# EAGLE board GB202-CC-from-SF-Base (EAGLE 7.5.0)
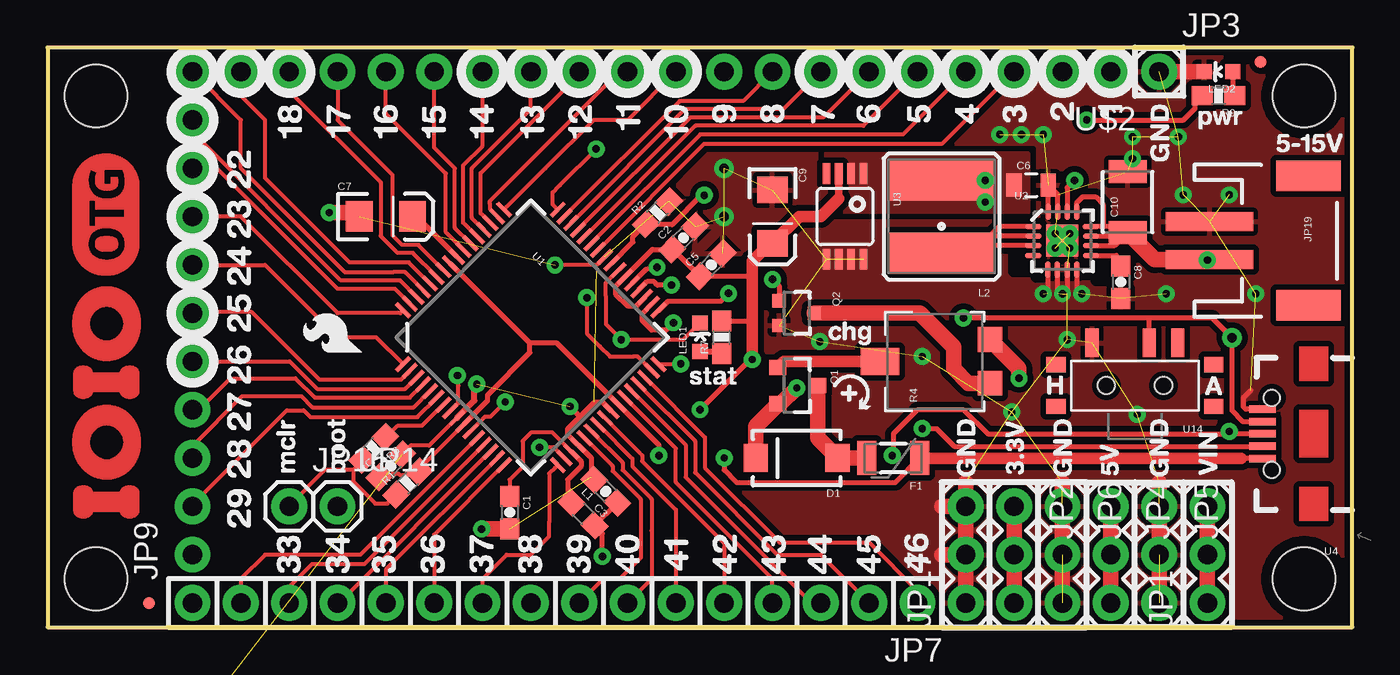
[diagram p0: board, top side]
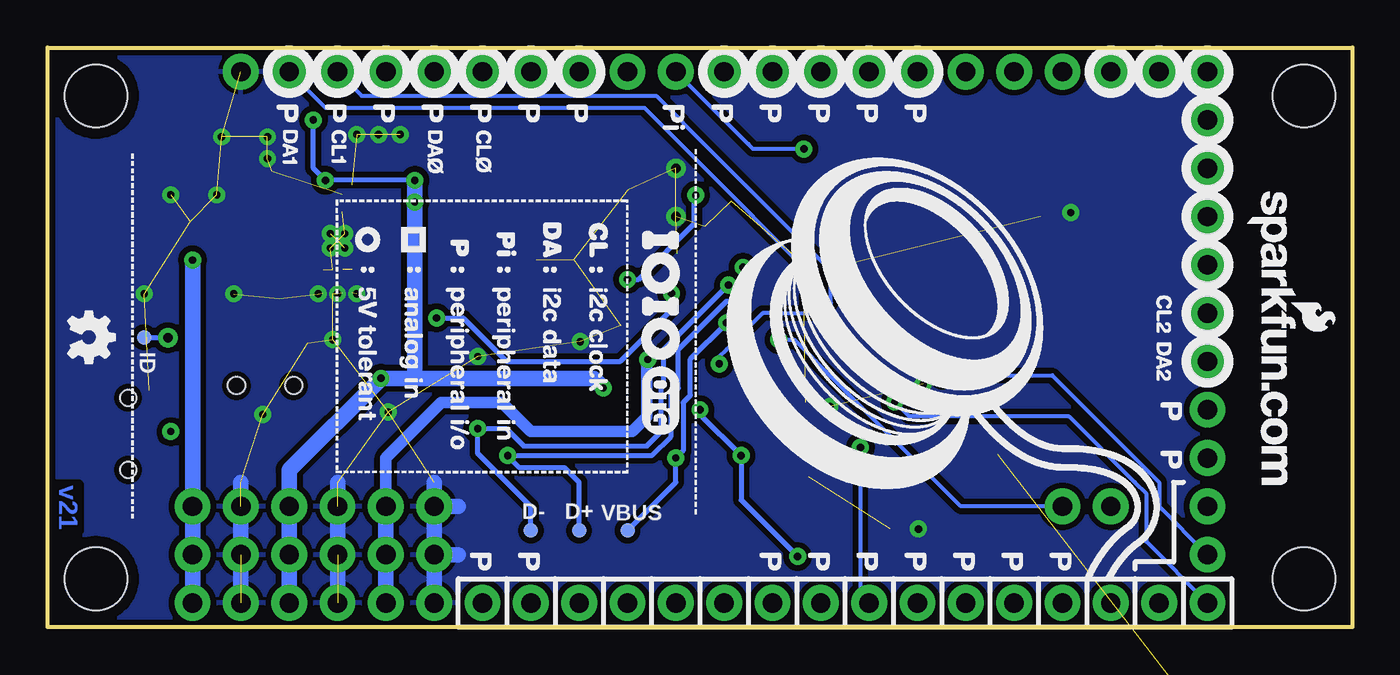
[diagram p1: board, bottom side, seen from below]

Size 68.58 x 30.48 mm. Coordinates in mm from the lower left corner, seen from the top.
Outline: 0,0 68.58,0 68.58,30.48 0,30.48 0,0
Copper layers (1*16): Top 0.035mm / dielectric 1.5mm / Bottom 0.035mm
Design rules "SparkFun *": minimum track width 7mil, minimum drill 15mil, track to track 8mil, track to pad 8mil, pad to pad 8mil, via to via 8mil, smd to smd 8mil, copper to edge 8mil, drill to drill 8mil, minimum pad ring 12mil, minimum via ring 10mil, stop-mask expansion 4mil, vias tented up to drill 20mil, thermal gap 10mil
tRestrict: area 52.7,18.6 to 52.9,19.1; area 52,18.4 to 52.4,19.1; area 53.7,18.5 to 54,19.1; area 54.2,18.5 to 55,19.1; area 52.7,21.6 to 52.9,22.1; area 53.1,19.4 to 53.6,19.5; area 53,21.2 to 53.5,21.3; area 50.8,18.7 to 51.2,19.6; area 51.2,18.7 to 51.7,19.2; area 55.1,18.2 to 55.8,19

## Footprints (pad centres in the part's own frame; a part is rotated, then mirrored left to right if it is on the bottom)
0603-CAP = smd 1.1 x 1: 1 -0.85,0; 2 0.85,0
0805 = smd 0.8 x 1.2: 1 -0.9,0; 2 0.9,0
EIA3216 = smd 1.4 x 1.6: A 1.4,0; C -1.4,0
1210 = smd 1.2 x 2: 1 -1.6,0; 2 1.6,0
C0603 = smd 1.1 x 1: 1 -0.85,0; 2 0.85,0
CAP-PTH-SMALL = drill 0.7 pad 1.651: 1 0,0; 2 2.54,0
SMA-DIODE = smd 1.27 x 1.47: A -2.15,0; C 2.15,0
PTC-1206 = smd 1 x 1.8: 1 -1.4,0; 2 1.4,0
DIL16 = drill 0.813 pad 1.6: 1 -8.89,-3.81 | drill 0.813 pad 1.6 octagon: 2 -6.35,-3.81; 3 -3.81,-3.81; 4 -1.27,-3.81; 5 1.27,-3.81; 6 3.81,-3.81; 7 6.35,-3.81; 8 8.89,-3.81; 9 8.89,3.81; 10 6.35,3.81; 11 3.81,3.81; 12 1.27,3.81; 13 -1.27,3.81; 14 -3.81,3.81; 15 -6.35,3.81; 16 -8.89,3.81
1X03 = drill 1.016 pad 1.88: 1 0,0; 2 2.54,0; 3 5.08,0
1X01 = drill 1.016 pad 1.88: 1 0,0
1X16_NO_SILK = drill 1.016 pad 1.88: 1 0,0; 2 2.54,0; 3 5.08,0; 4 7.62,0; 5 10.16,0; 6 12.7,0; 7 15.24,0; 8 17.78,0; 9 20.32,0; 10 22.86,0; 11 25.4,0; 12 27.94,0; 13 30.48,0; 14 33.02,0; 15 35.56,0; 16 38.1,0
MICRO-FIDUCIAL = smd 0.635 x 0.635: 1 0,0
1X11_NO_SILK = drill 1.016 pad 1.88: 1 0,0; 2 2.54,0; 3 5.08,0; 4 7.62,0; 5 10.16,0; 6 12.7,0; 7 15.24,0; 8 17.78,0; 9 20.32,0; 10 22.86,0; 11 25.4,0
STAND-OFF = hole 3.302: 0,0
JST-2-SMD = smd 1 x 4.6: 1 -1,-3.7; 2 1,-3.7 | smd 1.6 x 3.4: NC1 -3.4,1.5; NC2 3.4,1.5
0603 = smd 1.1 x 1: 1 -0.85,0; 2 0.85,0
CR54 = smd 5.5 x 2.15: P$1 0,1.92; P$2 0,-1.92
LED-0603 = smd 0.8 x 0.8: A 0,-0.75; C 0,0.75
SOT23-3 = smd 0.8 x 0.9: 1 -0.95,-1; 2 0.95,-1; 3 0,1.1
SOT323_NOAT = smd 0.7 x 0.7: 1 -0.65,-0.925; 2 0.65,-0.925; 3 0,0.925
HC49/S = drill 0.813: 1 -2.413,0; 2 2.413,0
0603-RES = smd 1.1 x 1: 1 -0.85,0; 2 0.85,0
TRIMPOT_5MM = smd 1.3 x 1.3: A 1.15,-2.54; C -1.15,-2.54 | smd 1.402 x 2: B 0,3.239
PAD.03X.03 = smd 0.762 x 0.762: P$1 0,0
PIC24FXXX_TQFP64 = smd 0.22 x 1: 1 -3.75,-5.75; 2 -3.25,-5.75; 3 -2.75,-5.75; 4 -2.25,-5.75; 5 -1.75,-5.75; 6 -1.25,-5.75; 7 -0.75,-5.75; 8 -0.25,-5.75; 9 0.25,-5.75; 10 0.75,-5.75; 11 1.25,-5.75; 12 1.75,-5.75; 13 2.25,-5.75; 14 2.75,-5.75; 15 3.25,-5.75; 16 3.75,-5.75; 33 3.75,5.75; 34 3.25,5.75; 35 2.75,5.75; 36 2.25,5.75; 37 1.75,5.75; 38 1.25,5.75; 39 0.75,5.75; 40 0.25,5.75; 41 -0.25,5.75; 42 -0.75,5.75; 43 -1.25,5.75; 44 -1.75,5.75; 45 -2.25,5.75; 46 -2.75,5.75; 47 -3.25,5.75; 48 -3.75,5.75 | smd 1 x 0.22: 17 5.75,-3.75; 18 5.75,-3.25; 19 5.75,-2.75; 20 5.75,-2.25; 21 5.75,-1.75; 22 5.75,-1.25; 23 5.75,-0.75; 24 5.75,-0.25; 25 5.75,0.25; 26 5.75,0.75; 27 5.75,1.25; 28 5.75,1.75; 29 5.75,2.25; 30 5.75,2.75; 31 5.75,3.25; 32 5.75,3.75; 49 -5.75,3.75; 50 -5.75,3.25; 51 -5.75,2.75; 52 -5.75,2.25; 53 -5.75,1.75; 54 -5.75,1.25; 55 -5.75,0.75; 56 -5.75,0.25; 57 -5.75,-0.25; 58 -5.75,-0.75; 59 -5.75,-1.25; 60 -5.75,-1.75; 61 -5.75,-2.25; 62 -5.75,-2.75; 63 -5.75,-3.25; 64 -5.75,-3.75
QFN16-3X3MM_1:1_V03 = smd 0.85 x 0.28: 1 -1.524,0.75; 2 -1.524,0.253; 3 -1.529,-0.25; 4 -1.527,-0.774; 9 1.503,-0.77; 10 1.498,-0.245; 11 1.498,0.255; 12 1.495,0.755 | smd 0.28 x 0.85: 5 -0.765,-1.513; 6 -0.265,-1.513; 7 0.263,-1.513; 8 0.763,-1.513; 13 0.758,1.518; 14 0.258,1.518; 15 -0.247,1.518; 16 -0.742,1.518 | smd 1.68 x 1.68: EXT -0.009,0.008
MSOP8 = smd 0.4 x 1.1: 1 -0.975,-2.25; 2 -0.325,-2.25; 3 0.325,-2.25; 4 0.975,-2.25; 5 0.975,2.25; 6 0.325,2.25; 7 -0.325,2.25; 8 -0.975,2.25
USB-AB-MICRO-SMD_V03 = smd 1.4 x 0.4: D+1 2.7,0; D-1 2.7,0.65; GND1 2.7,-1.3; ID1 2.7,-0.65; VBUS1 2.7,1.3 | hole 0.85: 2.2,1.9; 2.2,-1.9
TSSOP16 = smd 0.4 x 1.6: 1 -2.225,-2.85; 2 -1.575,-2.85; 3 -0.925,-2.85; 4 -0.275,-2.85; 5 0.375,-2.85; 6 1.025,-2.85; 7 1.675,-2.85; 8 2.325,-2.85; 9 2.325,3.05; 10 1.675,3.05; 11 1.025,3.05; 12 0.375,3.05; 13 -0.275,3.05; 14 -0.925,3.05; 15 -1.575,3.05; 16 -2.225,3.05
KPS-1290 = smd 0.7 x 1.5: O -2.25,2.25; P 0.75,2.25; S 2.25,2.25 | smd 1 x 0.8: P$1 -4.15,1.1; P$2 -4.15,-1.1; P$3 4.15,-1.1; P$4 4.15,1.1 | hole 0.9: -1.5,0; 1.5,0
1X19_NO_SILK = drill 1.016 pad 1.88: 1 0,0; 2 2.54,0; 3 5.08,0; 4 7.62,0; 5 10.16,0; 6 12.7,0; 7 15.24,0; 8 17.78,0; 9 20.32,0; 10 22.86,0; 11 25.4,0; 12 27.94,0; 13 30.48,0; 14 33.02,0; 15 35.56,0; 16 38.1,0; 17 40.64,0; 18 43.18,0; 19 45.72,0
RTRIM3362P = drill 0.6: 1 -2.54,-2.54; 2 0,0; 3 2.54,-2.54

## Placement (x,y rotation side)
C1  0.1uF  [0603-CAP]  24.28,6.02 270 top
C2  0.1uF  [0603-CAP]  33.43,20.47 45 top
C3  0.1uF  [0603-CAP]  29.34,7.14 135 top
C4  0.1uF  [0603-CAP]  18.03,8.48 45 top
C5  0.1uF  [0603-CAP]  34.87,19.05 45 top
C6  10uf  [0805]  51.69,23.24 0 top
C7  10uF  [EIA3216]  17.78,21.59 0 top
C8  3.3nF  [0603-CAP]  56.41,18.14 270 top
C9  10uf  [EIA3216]  38.1,21.59 270 top
C10  10uf  [1210]  56.77,22.35 90 top
C11  [C0603]  7.62,-74.93 0 top  (outside the outline)
C12  [C0603]  12.7,-74.93 0 top  (outside the outline)
C13  .1uF  [C0603]  13.97,-64.77 0 top  (outside the outline)
C14  .1uF  [C0603]  20.32,-64.77 0 top  (outside the outline)
C15  .1  [CAP-PTH-SMALL]  1.27,-21.59 0 top  (outside the outline)
C16  .1  [CAP-PTH-SMALL]  6.35,-21.59 0 top  (outside the outline)
C17  .1  [CAP-PTH-SMALL]  1.27,-26.67 0 top  (outside the outline)
C18  .1uF  [C0603]  1.27,-74.93 0 top  (outside the outline)
D1  DIODE-SCHOTTKY_  [SMA-DIODE]  39.37,8.89 180 top
F1  PTCSMD  [PTC-1206]  44.45,8.89 180 top
IC1  [DIL16]  10.16,-57.15 0 top  (outside the outline)
JP1  VIN  [1X03]  60.96,1.27 90 top
JP2  [1X03]  50.8,6.35 270 top
JP3  M01PTH  [1X01]  58.42,29.21 0 top
JP4  5V  [1X03]  55.88,6.35 270 top
JP5  [1X03]  58.42,6.35 270 top
JP6  [1X03]  53.34,6.35 270 top
JP7  M161X16_NO_SILK  [1X16_NO_SILK]  45.72,1.27 180 top
JP8  FIDUCIALUFIDUCIAL  [MICRO-FIDUCIAL]  5.33,1.27 0 top
JP9  M111X11_NO_SILK  [1X11_NO_SILK]  7.62,3.81 90 top
JP10  STAND-OFF  [STAND-OFF]  66.04,27.94 0 top
JP11  STAND-OFF  [STAND-OFF]  66.04,2.54 0 top
JP12  STAND-OFF  [STAND-OFF]  2.54,27.94 0 top
JP13  STAND-OFF  [STAND-OFF]  2.54,2.54 0 top
JP14  M01PTH  [1X01]  15.24,6.35 0 top
JP15  M01PTH  [1X01]  12.7,6.35 0 top
JP16  FIDUCIALUFIDUCIAL  [MICRO-FIDUCIAL]  63.75,29.72 0 top
JP17  [1X03]  48.26,1.27 90 top
JP19  JST Connector  [JST-2-SMD]  64.77,20.32 270 top
L1  30Ohm,1.8A  [0603]  28.14,5.94 315 top
L2  VLC5045T-3R3N  [CR54]  46.99,21.59 180 top
LED1  LY L29K-J1K2-26-Z  [LED-0603]  34.29,15.24 0 top
LED2  LS L29K-G1J2-1-Z  [LED-0603]  61.54,29.21 90 top
Q1  IRLML2244  [SOT23-3]  39.37,12.7 270 top
Q2  MOSFET-NCHANNEL2N7002PW"  [SOT323_NOAT]  39.37,16.51 270 top
Q3  4.4336Mhz  [HC49/S]  6.35,-67.31 0 top  (outside the outline)
R1  10k  [0603-RES]  18.92,7.57 45 top
R2  100k  [0603-RES]  32.05,21.79 45 top
R4  TRIMPOTSMD_STANDARD  [TRIMPOT_5MM]  46.99,13.97 90 top
R7  750  [0603-RES]  35.43,15.24 90 top
R8  470  [0603-RES]  17.14,9.4 225 top
R9  1.6k  [0603-RES]  61.54,27.94 180 top
TP1  TEST-POINT3  [PAD.03X.03]  38.1,5.08 0 bottom
TP2  TEST-POINT3  [PAD.03X.03]  43.18,5.08 0 bottom
TP3  TEST-POINT3  [PAD.03X.03]  40.64,5.08 0 bottom
TP4  TEST-POINT3  [PAD.03X.03]  63.5,15.24 180 bottom
U1  PIC24FJ256GB206  [PIC24FXXX_TQFP64]  25.4,15.24 315 top
U2  TPS6214X""  [QFN16-3X3MM_1:1_V03]  53.34,20.32 0 top
U3  VREG_MIC5216  [MSOP8]  41.91,21.59 180 top
U4  [USB-AB-MICRO-SMD_V03]  66.55,10.16 180 top
U5  MAX232TSSOP  [TSSOP16]  3.81,-15.24 0 top  (outside the outline)
U14  SWITCH_SPDT  [KPS-1290]  57.15,12.7 0 top
U$1  CREATIVE_COMMONS  [CREATIVE_COMMONS]  21.59,-10.16 0 top  (outside the outline)
U$2  M191X19_NO_SILK  [1X19_NO_SILK]  55.88,29.21 180 top
U$3  RTRIM-3362P  [RTRIM3362P]  3.81,-31.75 0 top  (outside the outline)
U$6  IOIO-OTG  [IOIO-OTG-COPPER-EXPOSED]  4.83,5.71 90 top
U$13  RTRIM-3362P  [RTRIM3362P]  15.24,-31.75 0 top  (outside the outline)
U$14  RTRIM-3362P  [RTRIM3362P]  3.81,-43.18 0 top  (outside the outline)

## Library data of the parts
C1-C5 C8 C9 C15-C17 = SparkFun-Capacitors
C6 C10 L1 TP1-TP4 = SparkFun-Passives
C7 JP1-JP6 JP8 JP10-JP17 JP19 LED2 = SparkFun
C11-C14 C18 = rcl
D1 Q1 Q2 = SparkFun-DiscreteSemi
F1 U2 U3 = SparkFun-PowerIC
IC1 = tcm3105
JP7 JP9 U$2 = SparkFun-Connectors
L2 = SparkFun-Passives; AM: 3.3uH
LED1 = SparkFun-LED
Q3 = crystal; OC_FARNELL: 1667008; OC_NEWARK: unknown
R1 R2 R7-R9 = SparkFun-Resistors
R4 U4 = Testing
U1 U5 = SparkFun-DigitalIC
U14 = SparkFun-Electromechanical
U$1 U$6 = SparkFun-Aesthetics
U$3 U$13 U$14 = GeekAmmo

## Nets
3.3V: C2.1 C3.1 C4.1 C5.1 C9.A JP2.1 JP2.2 JP2.3 L1.2 R1.2 R7.2 U1.10 U1.26 U1.35 U1.38 U1.57 U3.3
5V: C6.1 D1.C JP4.1 JP4.2 JP4.3 L2.P$2 Q1.2 R4.A R9.2 U2.14 U3.1 U3.2
+3.3: U5.16
+5.0: IC1.1 U$3.3 U$13.3
BOOT: JP14.1 LED1.C U1.39
D+: TP3.P$1 U1.37 U4.D+1
D-: TP2.P$1 U1.36 U4.D-1
GND: C1.2 C2.2 C3.2 C4.2 C5.2 C6.2 C7.C C8.2 C9.C C10.2 C11.2 C12.2 IC1.5 IC1.12 IC1.13 JP3.1 JP5.1 JP5.2 JP5.3 JP6.1 JP6.2 JP6.3 JP17.1 JP17.2 JP17.3 JP19.1 LED2.C Q2.2 R2.2 U1.9 U1.20 U1.25 U1.41 U2.5 U2.6 U2.7 U2.8 U2.15 U2.16 U2.EXT U3.5 U3.6 U3.7 U3.8 U4.GND1 U5.15 U14.O U$3.1 U$13.1 U$14.1
HOST: Q2.1 R2.1 U1.40
MCLR: R8.1 U1.7
N$1: Q1.1 R4.B
N$2: LED1.A R7.1
N$3: LED2.A R9.1
N$4: D1.A F1.2 Q1.3
N$5: C7.A U1.56
N$6: L2.P$1 U2.1 U2.2 U2.3
N$7: C8.1 U2.9
N$8: Q2.3 R4.C
N$9: C1.1 L1.1 U1.19
N$10: C11.1 IC1.16 Q3.2
N$11: C12.1 IC1.15 Q3.1
N$12: C13.1 IC1.4
N$13: C14.1 U$14.2
N$17: IC1.10 U$13.2
N$18: IC1.7 U$3.2
N$19: C18.1 IC1.11
N$20: C18.2 U$14.3
N$23: C15.1 U5.1
N$25: C15.2 U5.3
N$26: C16.1 U5.4
N$27: C16.2 U5.5
N$28: C17.2 U5.6
N$29: C17.1 U5.2
P7: JP15.1 R1.1 R8.2
PIN1: U1.31 U$2.1
PIN2: U1.32 U$2.2
PIN3: U1.42 U$2.3
PIN4: U1.43 U$2.4
PIN5: U1.44 U$2.5
PIN6: U1.45 U$2.6
PIN7: U1.46 U$2.7
PIN8: U1.47 U$2.8
PIN9: U1.48 U$2.9
PIN10: U1.49 U$2.10
PIN11: U1.50 U$2.11
PIN12: U1.51 U$2.12
PIN13: U1.52 U$2.13
PIN14: U1.53 U$2.14
PIN15: U1.54 U$2.15
PIN16: U1.55 U$2.16
PIN17: U1.58 U$2.17
PIN18: U1.59 U$2.18
PIN19: U1.60 U$2.19
PIN20: JP9.11 U1.61
PIN21: JP9.10 U1.62
PIN22: JP9.9 U1.63
PIN23: JP9.8 U1.64
PIN24: JP9.7 U1.1
PIN25: JP9.6 U1.2
PIN26: JP9.5 U1.3
PIN27: JP9.4 U1.4
PIN28: JP9.3 U1.5
PIN29: JP9.2 U1.6
PIN30: JP9.1 U1.8
PIN31: JP7.16 U1.11
PIN32: JP7.15 U1.12
PIN33: JP7.14 U1.13
PIN34: JP7.13 U1.14
PIN35: JP7.12 U1.15
PIN36: JP7.11 U1.16
PIN37: JP7.10 U1.17
PIN38: JP7.9 U1.18
PIN39: JP7.8 U1.21
PIN40: JP7.7 U1.22
PIN41: JP7.6 U1.23
PIN42: JP7.5 U1.24
PIN43: JP7.4 U1.27
PIN44: JP7.3 U1.28
PIN45: JP7.2 U1.29
PIN46: JP7.1 U1.30
QTR1-RX: U5.13
QTR1-RXD: U5.12
QTR1-TX: U5.14
QTR1-TXD: U5.11
QTR2-RX: U5.8
QTR2-RXD: U5.9
QTR2-TX: U5.7
QTR2-TXD: U5.10
RX-A: C13.2
TCM-RXD: IC1.8
TCM-TXD: IC1.14
TX-A: C14.2
USBID: TP4.P$1 U1.33 U4.ID1 U14.P
VBUS: F1.1 TP1.P$1 U1.34 U4.VBUS1
VIN: C10.1 JP1.1 JP1.2 JP1.3 JP19.2 U2.10 U2.11 U2.12 U2.13
VSS: IC1.9

## Tracks (layer width: path | path; a pad name or v marks a point on that pad's centre or on a via)
3.3V  (via drill 0.38)
  Top 0.203: U1.38 | 36.97,16.09 37.03,16.03 | C5.1 34.25,18.45 | R1.2 19.43,8.26 19.48,8.26 U1.10 | R1.2 19.36,8.34 19.36,8.08 | 29.16,4.93 L1.2 | C4.1 17.94,7.88 18.14,8.08 18.44,8.08 18.52,8 19.36,8 R1.2
  Top 0.254: U1.38 31.79,19.86 32.81,19.86 C2.1 32.85,19.87 C5.1 36.76,18.45 36.98,18.67 37.03,18.62 | U1.38 29.84,17.92 29.84,17.53 30.48,16.89 30.94,16.89 U1.35 | v32.13,9.02 32.13,9.57 U1.26 26.76,14.94 25.35,14.94 | U1.10 23.11,11.89 23.11,12.19 25.35,14.43 25.35,14.94 | 25.35,14.94 U1.57 | 37.02,15.89 37.03,15.88 | v34.29,11.43 36.93,14.07 v37.03,14.07 | R7.2 36.97,16.09 | L1.2 C3.1 | v29.16,3.71 29.16,4.93
  Top 0.406: U3.3 41.59,22.54
  Top 0.61: v37.03,14.07 37.03,15.88 37.03,16.03 37.03,18.62 37.03,19.25 38.1,20.32 C9.A 39.5,21.59 40.64,21.59 41.59,22.54
  Top 0.813: JP2.1 JP2.2 JP2.3
  Bottom 0.254: v34.29,11.43 34.29,11.18 v32.13,9.02 32.13,6.68 v29.16,3.71
  Bottom 0.61: JP2.1 50.8,8.89 47.88,11.81 44.7,11.81 43.18,10.29 37.85,10.29 37.08,11.05 37.08,14.02 v37.03,14.07
  Bottom 0.813: JP2.3 JP2.1
5V  (via drill 0.38)
  Top 0.254: v53.98,23.5 53.59,23.11 U2.14 | v54.61,26.67 59.69,26.67 60.31,27.29 60.31,27.56 R9.2
  Top 0.813: JP4.1 JP4.2 JP4.3 | Q1.2 38.42,11.75 | 38.42,11.75 37.22,10.55 D1.C | v51.05,13.08 51.05,13.59 R4.A | 38.42,11.75 38.55,11.75 v39.37,12.57
  Bottom 0.254: v54.61,26.67 54.61,24.13 v53.98,23.5 v49.28,23.5
  Bottom 0.813: JP4.3 JP4.1 55.88,8.26 v51.05,13.08 49.53,13.08 | 49.53,13.08 39.88,13.08 v39.37,12.57 | v49.28,23.5 49.28,13.34 49.53,13.08
  other vias: 49.28,22.35
  pour Top (isolate 0.305, rank 2, no thermals): 40.89,21.84 51.56,21.84 51.56,24.89 40.89,24.89
+5.0  (2 unrouted)
BOOT  (via drill 0.38)
  Top 0.203: U1.39 29.34,18.12 29.34,17.4 29.34,17.02 29.34,15.93 v30.15,15.11 33.41,15.11 LED1.C
  Top 0.254: LED1.C 34.28,15.99
  Bottom 0.203: JP14.1 20.32,6.35 20.57,6.35 28.19,13.97 | 28.19,13.97 28.45,14.22 | 28.19,13.97 28.45,14.22 | v30.15,15.11 29.34,15.11 28.45,14.22
D+  (via drill 0.38)
  Top 0.254: v32.03,18.92 31.43,18.8 U1.37 | v44.4,9.02 44.45,9.07 44.45,10.16 45.72,11.43 48.13,11.43 49.4,10.16 61.98,10.16 v62.1,10.29 62.23,10.16 U4.D+1
  Bottom 0.254: v32.03,18.92 32,18.9 32,17.65 32.51,17.14 32.89,17.14 35.43,14.61 35.43,12.57 35.81,12.19 35.81,10.03 36.83,9.02 v44.4,9.02 43.76,8.38 41.4,8.38 40.64,7.62 TP3.P$1 | 62.36,10.03 v62.1,10.29
D-  (via drill 0.38)
  Top 0.254: v32.79,17.98 32.05,17.98 31.88,18.16 31.5,18.16 U1.36 | v45.97,10.44 46.71,10.44 47.64,9.51 U4.D-1
  Bottom 0.254: v32.79,17.98 32.82,17.98 36.2,14.61 36.2,12.7 36.32,12.57 36.32,10.29 37.08,9.53 43.56,9.53 44.48,10.44 v45.97,10.44 45.97,9.14 43.18,6.35 TP2.P$1
GND  (via drill 0.38, 0.38 pad 0.03, 0.38 pad 0.89, 0.51)  (65 unrouted)
  Top 0.203: U1.41 28.86,19.05 v26.67,19.05 | U1.9 20.05,9.54 19.09,9.54 C4.2
  Top 0.254: U1.25 29.18,11.81 28.73,11.81 28,11.09 | C7.C 16.18,21.79 | 28,11.09 27.33,10.41 27.33,10.13 U1.20 27.88,9.58 28.57,8.89 28.57,7.9 C3.2 | v27.46,11.61 27.98,11.09 28,11.09 | U2.5 52.58,17.59 52.56,17.57 | U2.6 53.08,17.59 53.09,17.57 | U2.7 53.6,17.54 53.59,17.53 | U2.8 54.1,17.57 | U2.16 52.6,22.86 | 52.6,22.86 C6.2 | U2.15 53.09,22.74 C6.2 52.59,22.87 52.6,22.86 | U4.GND1 62.96,11.46 62.87,11.56 62.87,12.06 63.25,12.45
  Top 0.305: U1.9 22.43,11.91 22.43,12.65 v22.55,12.78
  Top 0.813: 16.18,21.79 v14.81,21.79 | JP6.3 53.34,7.62 | JP17.1 JP17.2 | JP17.2 JP17.3 | JP17.3 48.26,7.62 | JP17.3 46.99,6.35 | JP17.2 46.99,3.81 | 58.42,7.62 JP5.3 | LED2.C JP3.1 | v22.81,5.16 24.27,5.16 C1.2
  Bottom 0.813: 48.26,7.62 JP17.3 | JP17.3 JP17.2 | JP17.2 JP17.1 | JP17.3 46.99,6.35 | JP17.2 46.99,3.81 | 53.34,7.62 JP6.3 | 58.42,7.62 JP5.3
  other vias: 59.69,22.73 62.1,22.73 58.8,17.53 63.5,17.53 57.28,11.18 45.97,14.22 40.59,15.01 52.96,20.7 53.72,20.7 52.96,19.94 53.72,19.94 50.67,11.3 53.59,15.11 59.44,25.78 57.02,25.78 57.02,24.64 52.32,25.91 51.18,25.91 50.04,25.91 35.56,24.13 35.56,21.59 52.32,17.53 53.34,17.53 54.36,17.53
  pour Bottom (isolate 0.305): 6.35,30.48 68.58,30.48 68.58,0 6.35,0
  pour Top (isolate 0.305, rank 6): 32.03,30.35 32.03,-0.13 68.58,0 68.58,30.48
  pour Top (no thermals): 40.51,20.07 40.51,18.41 43.31,18.41 43.31,20.07
HOST  (via drill 0.38)
  Top 0.254: v38.1,18.29 38.45,17.94 Q2.1 | U1.40 30.76,20.24 30.76,20.55 31.4,21.19 R2.1 31.48,21.17 32.83,21.17 34.37,22.71 v34.52,22.71
  Bottom 0.254: v38.1,18.29 37.52,18.29 34.59,21.21 34.59,22.63 v34.52,22.71
MCLR
  Top 0.203: U1.7 19.69,10.59 18.41,10.59 17.82,10 R8.1
N$1
  Top 0.61: R4.B 38.69,13.97 Q1.1
N$2
  Top 0.305: LED1.A 35.46,14.49 R7.1
N$3
  Top 0.254: 62.29,28.07 R9.1 62.29,28.04 LED2.A
N$4
  Top 0.813: Q1.3 40.47,9.94 D1.A F1.2
N$5
  Top 0.203: 19.4,21.59 C7.A
  Top 0.254: U1.56 19.4,21.59
N$6
  Top 0.254: U2.3 49.02,20.07 | 49.02,20.07 47.39,20.07 L2.P$1 | U2.2 49.52,20.57 | 49.52,20.57 49.02,20.07 | U2.1 50.02,21.07 49.52,20.57
N$7
  Top 0.254: U2.9 56.17,19.55 56.4,19.33 56.4,18.8 C8.1
N$8
  Top 0.813: Q2.3 45.85,16.51 47.62,14.73 47.62,13.59 48.39,12.82 R4.C
N$9
  Top 0.203: U1.19 26.49,10.26 25.45,10.26 24.97,9.78 24.97,8.43 24.28,7.75 C1.1
  Top 0.254: U1.19 28.04,8.71 28.04,8.46 27.33,7.75 27.33,6.76 L1.1
N$10  (2 unrouted)
N$11  (2 unrouted)
N$12  (1 unrouted)
N$13  (1 unrouted)
N$17  (1 unrouted)
N$18  (1 unrouted)
N$19  (1 unrouted)
N$20  (1 unrouted)
N$23  (1 unrouted)
N$25  (1 unrouted)
N$26  (1 unrouted)
N$27  (1 unrouted)
N$28  (1 unrouted)
N$29  (1 unrouted)
P7
  Top 0.203: JP15.1 12.7,6.38 14.61,8.28 16.03,8.28 16.05,8.26 | 18.25,7.04 R1.1 17.86,6.5 17.22,6.5 16.05,7.67 16.05,8.26 | R8.2 16.54,8.75 16.05,8.26
PIN1  (via drill 0.38)
  Top 0.203: v28.35,17.32 28.35,16.89 28.35,16.48 28.35,15.44 29.03,14.76 29.57,14.22 30.76,14.22 31.01,14.22 U1.31
  Bottom 0.203: v28.35,17.32 28.35,18.44 28.91,19 34.04,24.13 37.21,27.3 53.98,27.3 U$2.1
PIN2  (via drill 0.38)
  Top 0.203: U1.32 32.13,13.84 v33.27,13.84
  Bottom 0.203: v33.27,13.84 33.27,14.22 32.89,14.61 30.99,16.51 30.48,16.51 27.94,16.51 27.41,17.04 27.41,18.75 33.81,25.15 36.6,27.94 52.07,27.94 U$2.2
PIN3
  Top 0.203: U$2.3 46.99,25.4 34.5,25.4 U1.42
PIN4
  Top 0.203: U$2.4 44.96,25.91 34.3,25.91 U1.43
PIN5
  Top 0.203: U$2.5 42.88,26.36 34.05,26.36 U1.44
PIN6
  Top 0.203: U$2.6 40.77,26.8 33.77,26.8 U1.45
PIN7
  Top 0.203: U$2.7 38.66,27.23 33.5,27.23 U1.46
PIN8
  Top 0.203: U$2.8 36.55,27.66 33.22,27.66 U1.47
PIN9  (via drill 0.38)
  Top 0.203: v28.83,25.15 26.92,23.24 26.54,22.86 26.54,22.23 U1.48
  Bottom 0.203: U$2.9 31.75,25.4 31.5,25.15 v28.83,25.15
PIN10
  Top 0.203: U1.49 26.16,24.13 28.7,26.67 30.48,26.67 U$2.10
PIN11
  Top 0.203: U1.50 23.24,22 23.24,22.25 23.24,22.4 29.39,28.55 30.05,29.21 U$2.11
PIN12
  Top 0.203: U1.51 22.76,21.77 22.76,22.15 22.76,23.88 27.43,28.55 27.94,29.06 U$2.12
PIN13
  Top 0.203: U1.52 22.3,21.52 22.3,24.13 25.4,27.23 U$2.13
PIN14
  Top 0.203: U1.53 21.84,21.27 21.84,24.13 21.84,24.28 22.86,25.3 U$2.14
PIN15
  Top 0.203: U1.54 21.41,21 21.41,24.13 20.32,25.22 U$2.15
PIN16
  Top 0.203: U1.55 20.93,20.77 20.93,23.85 17.78,27 U$2.16
PIN17
  Top 0.203: U$2.17 15.24,26.67 17.78,24.13 18.14,23.77 18.14,20.6 18.21,20.52 18.64,20.09 19.49,20.09 U1.58
PIN18
  Top 0.203: U$2.18 12.7,28.19 17.5,23.39 17.5,20.57 18.4,19.67 19.2,19.67 U1.59
PIN19
  Top 0.203: U1.60 18.99,19.18 18.29,19.18 15.88,19.18 14.99,20.07 13.97,21.08 11.43,23.62 11.43,26.67 10.16,27.94 U$2.19
PIN20
  Top 0.203: U1.61 18.79,18.67 18.16,18.67 15.62,18.67 15.24,19.05 12.7,21.59 10.16,24.13 10.16,26.67 JP9.11
PIN21
  Top 0.203: U1.62 18.59,18.16 18.51,18.24 16.76,18.24 15.49,18.24 15.42,18.24 7.62,26.04 JP9.10
PIN22
  Top 0.203: U1.63 18.26,17.78 15.24,17.78 8.89,24.13 JP9.9
PIN23
  Top 0.203: U1.64 18.54,16.51 15.24,16.51 10.16,21.59 JP9.8
PIN24
  Top 0.203: U1.1 17.27,15.24 15.24,15.24 11.43,19.05 JP9.7
PIN25
  Top 0.203: U1.2 18.57,13.01 14.3,13.01 10.74,16.56 7.67,16.56 JP9.6
PIN26
  Top 0.203: JP9.5 12.72,13.97 14.17,12.52 18.79,12.52 U1.3
PIN27
  Top 0.203: 19.73,12.74 19.73,12.77 U1.4 19.04,12.06 14.05,12.06 13.03,13.08 9.6,13.08 7.95,11.43 JP9.4
PIN28
  Top 0.203: 20.08,12.39 20.08,12.41 U1.5 19.24,11.56 13.92,11.56 13.34,12.14 10.24,12.14 7.62,9.53 JP9.3
PIN29
  Top 0.203: 20.45,12.04 U1.6 19.44,11.05 13.82,11.05 13.46,11.4 12.57,11.4 7.62,6.45 JP9.2
PIN30  (via drill 0.38)
  Top 0.203: U1.8 21.59,11.78 21.59,12.7 21.59,13.18 v21.54,13.23
  Bottom 0.203: v21.54,13.23 15.77,13.23 10.16,7.62 10.16,6.35 JP9.1
PIN31  (via drill 0.38)
  Top 0.203: U1.11 23,11.07 23.29,11.07 v24.05,11.84
  Bottom 0.203: JP7.16 10.85,4.5 10.85,7.04 11.43,7.62 14.88,11.07 23.29,11.07 v24.05,11.84
PIN32
  Top 0.203: U1.12 16.45,3.81 11.43,3.81 10.16,2.54 JP7.15
PIN33
  Top 0.203: U1.13 16.64,3.3 13.89,3.3 12.7,2.11 JP7.14
PIN34
  Top 0.203: U1.14 15.32,1.27 JP7.13
PIN35
  Top 0.203: U1.15 17.78,3.02 JP7.12
PIN36
  Top 0.203: U1.16 20.32,4.86 JP7.11
PIN37
  Top 0.203: JP7.10 22.86,2.54 24.13,3.81 25.4,3.81 26.36,4.78 26.36,5.51 26.36,8.07 26.67,8.38 U1.17
PIN38  (via drill 0.38)
  Top 0.203: U1.18 26.59,9.45 v25.86,9.45
  Bottom 0.203: v25.86,9.45 25.86,1.73 JP7.9
PIN39
  Top 0.203: U1.21 29.69,8.47 29.69,8.2 31.17,6.73 31.17,3.63 30.07,2.54 29.21,2.54 JP7.8
PIN40
  Top 0.203: U1.22 30.23,8.65 30.23,8.26 31.75,6.73 31.75,5.08 31.75,2.54 JP7.7
PIN41
  Top 0.203: U1.23 30.73,8.85 30.73,8.46 33.02,6.17 JP7.6
PIN42
  Top 0.203: U1.24 31.11,9.17 31.24,9.04 31.24,8.71 35.56,4.39 35.56,4.19 JP7.5
PIN43
  Top 0.203: JP7.4 38.1,2.54 33.02,7.62 33.02,9.39 U1.27
PIN44
  Top 0.203: U1.28 33.53,9.59 33.53,7.87 40.13,1.27 JP7.3
PIN45
  Top 0.203: U1.29 34.04,9.79 34.04,8.13 38.35,3.81 40.64,3.81 JP7.2
PIN46
  Top 0.203: U1.30 34.54,9.98 34.54,8.38 38.48,4.45 43.18,4.45 45.72,1.91 JP7.1
USBID  (via drill 0.38, 0.51)
  Top 0.254: 57.91,16.26 v48.13,16.26 | U14.P 57.9,16.24 57.91,16.26 | U4.ID1 63.86,10.79 62.84,10.79 62.26,11.38 v62.26,15.21 61.21,16.26 57.91,16.26 | U1.33 32.61,17.14 35.38,17.14 v35.79,17.55
  Bottom 0.254: v48.13,16.26 46.74,16.26 44.45,13.97 38.48,13.97 35.79,16.66 v35.79,17.55 | v62.26,15.21 63.35,15.21 TP4.P$1
VBUS  (via drill 0.38)
  Top 0.254: v32.89,16 32.51,15.62 31.75,15.62 31.24,16.13 31.24,16.49 U1.34 | v35.56,8.89 35.56,8.26 36.2,7.62 44.58,7.62 F1.1 45.88,8.86 | U4.VBUS1 62.74,8.86
  Top 0.61: 45.88,8.86 62.74,8.86
  Bottom 0.254: v32.89,16 34.8,14.1 34.8,12.19 35.18,11.81 35.18,9.27 v35.56,8.89 35.56,7.62 TP1.P$1
VIN  (via drill 0.38)
  Top 0.254: U2.13 54.1,22.33 54.4,22.63 55.08,22.63 55.48,22.23 55.48,21.09 | 55.48,21.09 55.46,21.07 U2.12 | 55.48,21.09 56.43,21.09 57.15,20.37 57.15,20.32 56.77,20.7 C10.1 56.59,20.57 | U2.11 56.59,20.57 | U2.10 56.09,20.07 56.59,20.57 | JP19.2 60.98,19.32 v60.96,19.3
  Top 0.813: JP1.3 JP1.2 JP1.1 | JP19.2 58.2,19.32 C10.1
  Bottom 0.813: JP1.1 JP1.3 v60.96,19.3

## Text on the board
Bottom: v21
bPlace: ID | VBUS | D+ | D-